# Altium PCB PCB1.PcbDoc
Units mm, origin at the board's own origin, x right, y up, seen from the top; angles counter-clockwise.
Board outline 50 x 70 mm, 2 copper layers (Top Layer, Bottom Layer); 36 components, 50 nets, 178 pads, 6 vias.
Unrouted connection lines stored in the file: 1.
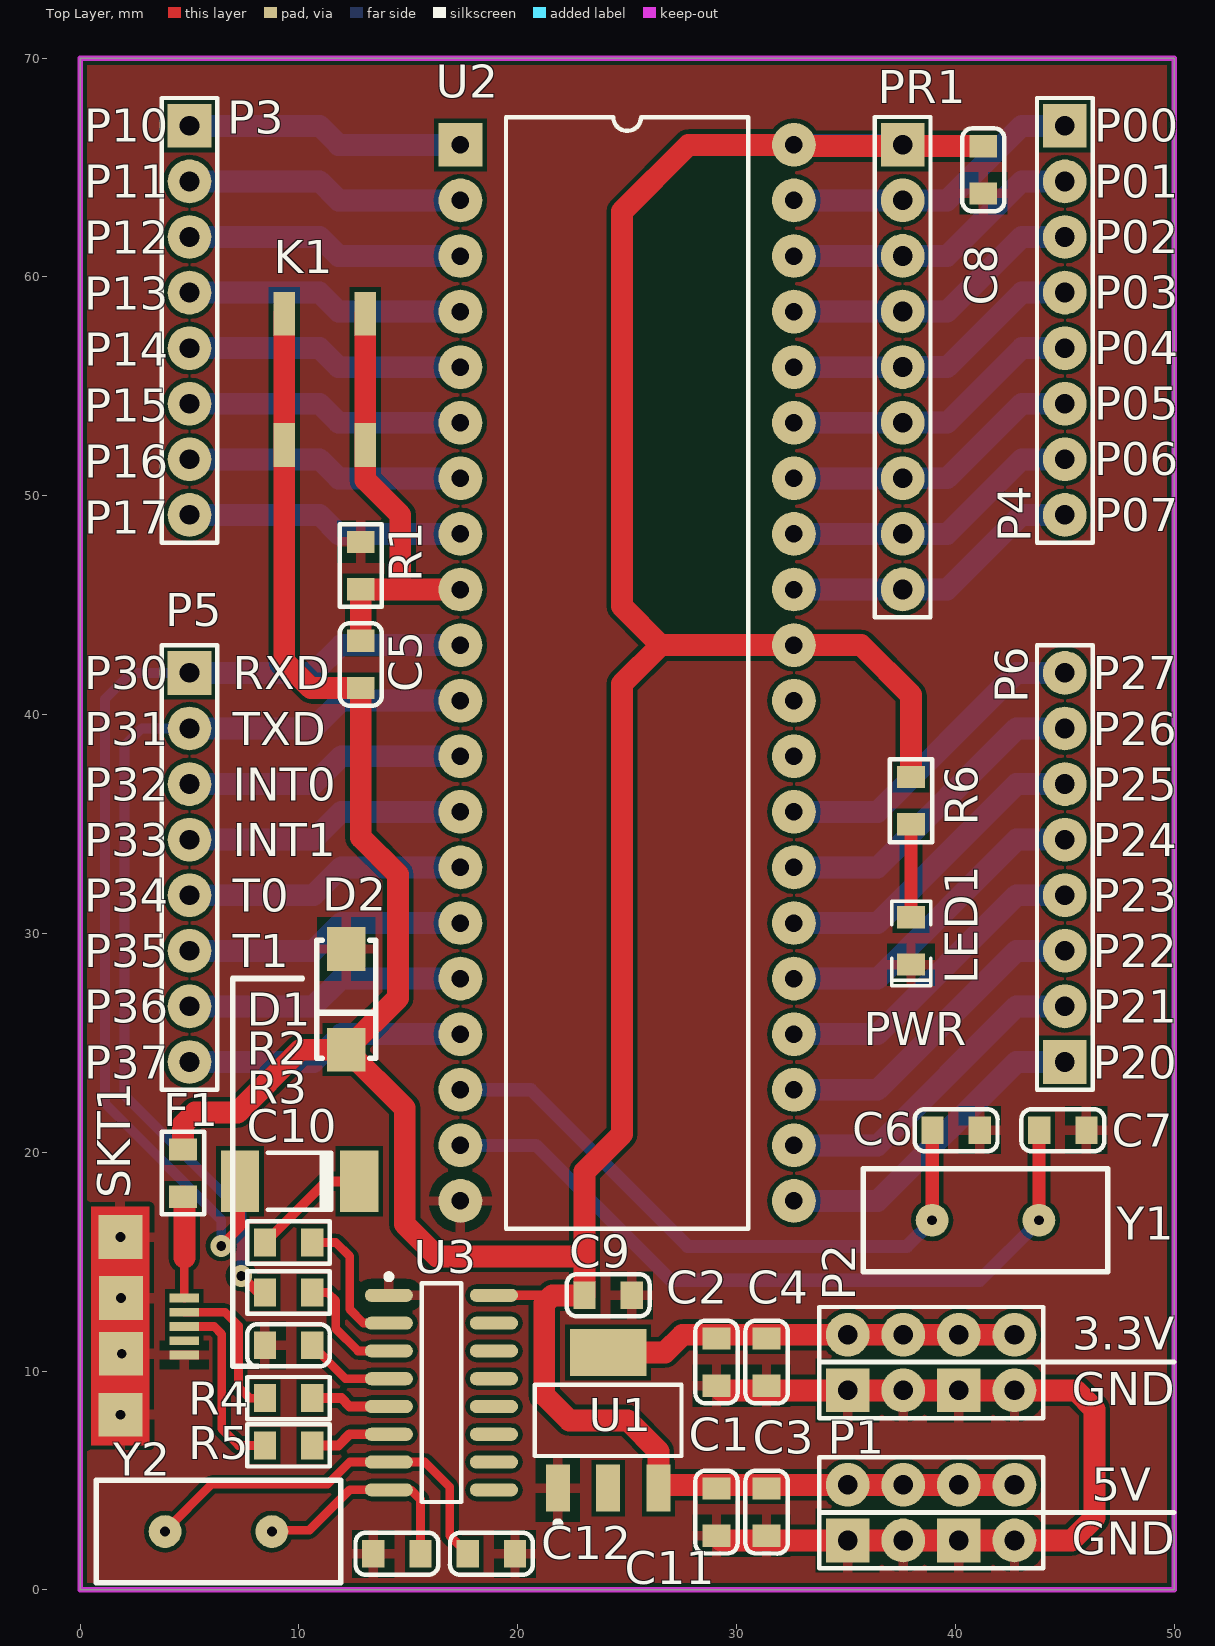
[diagram p0: Top Layer view]
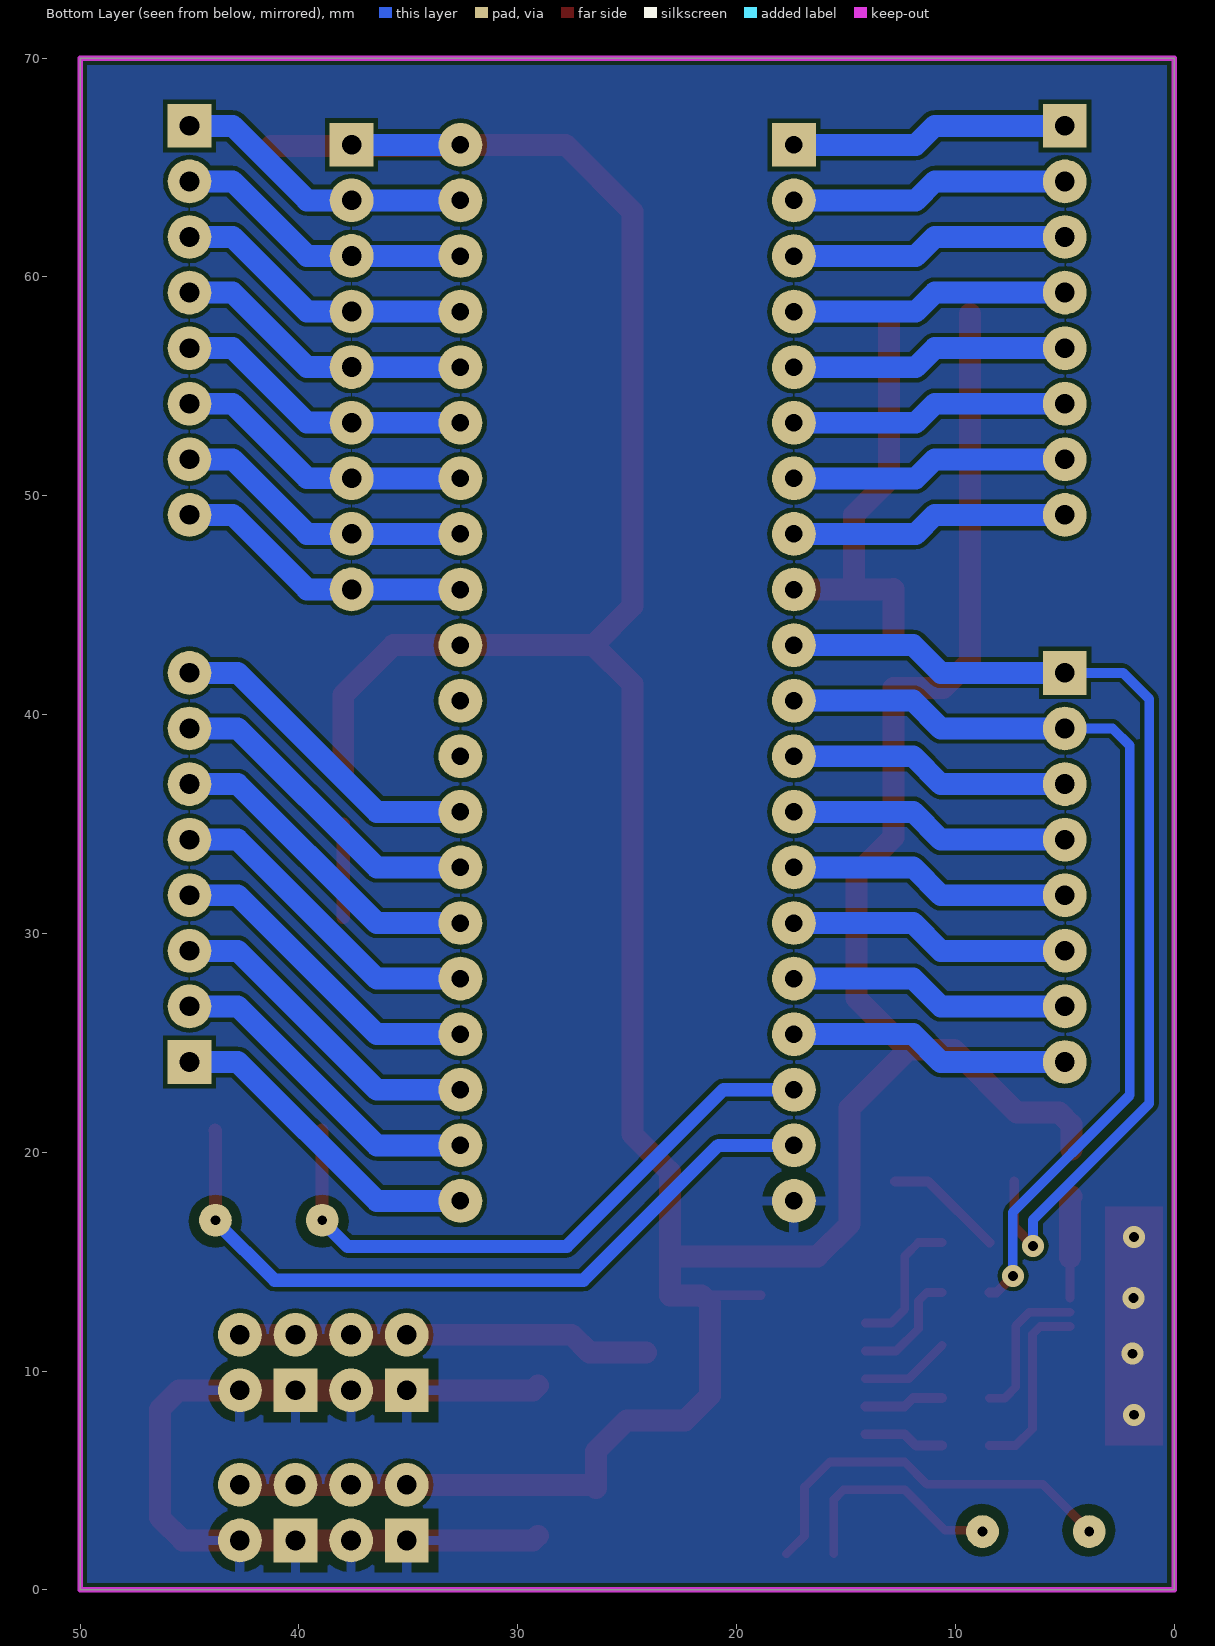
[diagram p1: Bottom Layer view, seen from below]

## Layer stack, top to bottom
Top Solder: solder mask 0.0102, Solder Resist, Dk 3.5
Top Layer: signal copper 0.0356
Dielectric 1: dielectric 0.32, FR-4, Dk 4.8
Bottom Layer: signal copper 0.0356
Bottom Solder: solder mask 0.0102, Solder Resist, Dk 3.5

## Board outline
0,0 50,0 50,70 0,70

## Design rules (kind name [scope] priority, off if disabled: settings)
Clearance [All] p1: gap=0.2
PlaneConnect [All] p1: planeconnectstyle=Relief reliefexpansion=0.508 reliefentries=4 reliefconductorwidth=0.45 reliefairgap=0.45
PolygonConnect [All] p1: connectstyle=Relief reliefconductorwidth=0.45 reliefentries=4 polygonreliefangle="90 Angle" airgapwidth=0.45
RoutingVias [All] p1: holewidth=0.711 width=1.27 viastyle="Through Hole" minholewidth=0.711 minwidth=1.27 maxholewidth=0.711 maxwidth=1.27
SolderMaskExpansion [All] p1: expansion=0.102
Width [All] p1: maxlimit=3 minlimit=0.254 preferedwidth=0.254
29 further rules are at their usual default settings.

## Components (designator, comment, footprint, x,y, rotation, side; value= is the part's Value field where it differs from the comment)
C1 "Cap Pol2" 0805C 29.083,3.556 r270 top
C2 "Cap Pol2" 0805C 29.083,10.414 r270 top
C3 "Cap" 0805C 31.369,3.556 r90 top
C4 "Cap" 0805C 31.369,10.414 r90 top
C5 "Cap Pol2" 0805C 12.827,42.291 r90 top
C6 "Cap" 0805C 40.03,21.006 r180 top
C7 "Cap" 0805C 44.907,21.006 r180 top
C8 "Cap" 0805C 41.275,64.897 r90 top
C9 "Cap" 0805C 24.13,13.462 r180 top
C10 "Cap" 0805C 9.525,11.176 r180 top
C11 "Cap" 0805C 18.796,1.651 r0 top
C12 "Cap" 0805C 14.478,1.651 r180 top
D1 "1N4148" 1206D 10.033,18.669 r0 top
D2 "D Zener" DO-214 12.167,29.286 r270 top
F1 "Res2" 0805R 4.699,19.05 r90 top
K1 "SW" IT-1187 13.03,58.318 r270 top
LED1 "LED3" LED0805G 37.973,30.734 r270 top
P1 "Header 4X2" "HDR 2X4" 37.617,2.261 r0 top
P2 "Header 4X2" "HDR 2X4" 37.617,9.119 r0 top
P3 "Header 8" "HDR 1X8" 5,66.905 r270 top
P4 "Header 8" "HDR 1X8" 45,66.905 r270 top
P5 "Header 8" "HDR 1X8" 5,41.905 r270 top
P6 "Header 8" "HDR 1X8" 45,24.125 r90 top
PR1 "10K" HDR1X9 37.592,66.04 r270 top
R1 "Res1" 0805R 12.827,46.812 r270 top
R2 "Res1" 0805R 9.525,15.875 r0 top
R3 "Res1" 0805R 9.525,13.589 r0 top
R4 "Res1" 0805R 9.525,8.763 r0 top
R5 "Res1" 0805R 9.525,6.604 r0 top
R6 "Res1" 0805R 37.973,36.068 r90 top
SKT1 "USB" MicroUSB 3.302,12.065 r180 top
U1 "LM1117" SOT_223 24.13,7.747 r0 top
U2 "89C52" DIP403D 25,41.905 r0 top
U3 "CH340" SOIC-16 16.51,9.017 r0 top
Y1 "12MHz" HC49 41.375,16.891 r0 top
Y2 "12MHz" HC49 6.323,2.667 r0 top

## Footprints (in the part's own frame and the unit in brackets; to place one, negate y for a bottom-side part, rotate by r counter-clockwise, add the part's x,y. Pads: shape width x height; smd on the part's side, far side on the other; paste and mask are expansions set on the pad)
0805C [mil]
  rect 40x50 smd: 1(-42.5,0) 2(42.5,0)
  silkscreen extent -75,-38 75,38, body extent -39,-25 39,25, height 30
0805R [mil]
  rect 40x50 smd: 1(-42.5,0) 2(42.5,0)
  silkscreen extent -74,-38 74,38, body extent -39,-25 40,25, height 30
1206D [mm]
  rect 1.75x2.8 smd: 1(-2.725,0) 2(2.725,0)
  silkscreen extent -1.45,-1.3 1.45,1.3, body extent -2.6,-1.23 2.6,1.23, height 2.46
DIP403D [mm]
  rect 2x2 hole 0.8: 1(-7.62,24.13)
  round 2 hole 0.8: 2(-7.62,21.59) 3(-7.62,19.05) 4(-7.62,16.51) 5(-7.62,13.97) 6(-7.62,11.43) 7(-7.62,8.89) 8(-7.62,6.35) 9(-7.62,3.81) 10(-7.62,1.27) 11(-7.62,-1.27) 12(-7.62,-3.81) 13(-7.62,-6.35) 14(-7.62,-8.89) 15(-7.62,-11.43) 16(-7.62,-13.97) 17(-7.62,-16.51) 18(-7.62,-19.05) 19(-7.62,-21.59) 20(-7.62,-24.13) 21(7.62,-24.13) 22(7.62,-21.59) 23(7.62,-19.05) 24(7.62,-16.51) 25(7.62,-13.97) 26(7.62,-11.43) 27(7.62,-8.89) 28(7.62,-6.35) 29(7.62,-3.81) 30(7.62,-1.27) 31(7.62,1.27) 32(7.62,3.81) 33(7.62,6.35) 34(7.62,8.89) 35(7.62,11.43) 36(7.62,13.97) 37(7.62,16.51) 38(7.62,19.05) 39(7.62,21.59) 40(7.62,24.13)
  silkscreen extent -5.54,-25.4 5.54,25.4, body extent -7.65,-25.02 7.65,25.78, height 5.55
DO-214 [mm]
  rect 2x1.75 smd: 1(0,0) 2(4.6,0)
  silkscreen extent -0.4,-1.35 5,1.35, body extent -0.2,-1.34 4.91,1.33, height 2.12
HC49 [mm]
  round 1.5 hole 0.45: 1(-2.44,0) 2(2.44,0)
  silkscreen extent -5.59,-2.35 5.59,2.35, body extent -5.68,-2.34 5.67,2.31, height 3.7
HDR1X9 [mm] "Connector; Header; 9 Position"
  rect 2x2 hole 0.9: 1(0,0)
  round 2 hole 0.9: 2(2.54,0) 3(5.08,0) 4(7.62,0) 5(10.16,0) 6(12.7,0) 7(15.24,0) 8(17.78,0) 9(20.32,0)
  silkscreen extent -1.27,-1.27 21.59,1.27
"HDR 1X8" [mm] "Connector; Header; 8 Position"
  rect 2x2 hole 0.9: 1(0,0)
  round 2 hole 0.9: 2(2.54,0) 3(5.08,0) 4(7.62,0) 5(10.16,0) 6(12.7,0) 7(15.24,0) 8(17.78,0)
  silkscreen extent -1.27,-1.27 19.05,1.27, body extent -1.27,-1.27 19.05,1.27, height 0.7
"HDR 2X4" [mm]
  rect 2x2 hole 0.9: 1(-2.54,0) 5(2.54,0)
  round 2 hole 0.9: 2(-2.54,2.54) 3(0,0) 4(0,2.54) 6(2.54,2.54) 7(5.08,0) 8(5.08,2.54)
  silkscreen extent -3.84,-1.27 6.4,3.81, body extent -3.81,-1.3 6.35,3.81, height 8.38
IT-1187 [mm]
  rect 2x1 smd: 1(0,0) 1(6,0) 2(0,-3.7) 2(6,-3.7)
  body extent -0.25,-4.45 6.15,0.75, height 1.5
LED0805G [mil]
  rect 40x50 smd: 1(0,0) 2(85,0)
  silkscreen extent -29,-35 123,35, body extent 3,-24 83,25, height 43
MicroUSB [mm]
  rect 1.35x0.4 smd: 1(-1.46,-1.27) 2(-1.46,-0.62) 3(-1.46,0.03) 4(-1.46,0.68) 5(-1.461,1.33)
  rect 2x2 smd: 6(1.461,-4.064) 7(1.46,4.064) 8(1.435,-1.27) 9(1.435,1.27)
  body extent -1.71,-4.4 3.89,4.4, height 2.74
SOIC-16 [mm] "SOIC, 16-Leads, Body 9.90x3.90mm, Pitch 1.27mm, IPC Medium Density"
  oval 2.2x0.6 smd: 1(-2.4,4.445) 2(-2.4,3.175) 3(-2.4,1.905) 4(-2.4,0.635) 5(-2.4,-0.635) 6(-2.4,-1.905) 7(-2.4,-3.175) 8(-2.4,-4.445) 9(2.4,-4.445) 10(2.4,-3.175) 11(2.4,-1.905) 12(2.4,-0.635) 13(2.4,0.635) 14(2.4,1.905) 15(2.4,3.175) 16(2.4,4.445)
  silkscreen extent -2.52,-5 0.9,5.42, body extent -3,-4.95 3,4.95, height 1.4
SOT_223 [mm] "SOT-223/SC-73; 4 Leads; Body 6.7 x 7.3 mm, inc. leads (LxW max)"
  rect 1.1x2.15 smd: 1(2.3,-3.1) 2(-2.3,-3.1) 3(0,-3.1)
  rect 3.5x2.15 smd: 4(0,3.1)
  silkscreen extent -3.35,-4.85 3.35,1.63, body extent -3.25,-3.58 3.25,3.38, height 1.65

## Part data
C1 C2 C5: "Polarized Capacitor (Axial)"
C3 C4 C6 C7 C8 C9 C10 C11 C12: "Capacitor"
D1: library part "Diode 1N4148", "High Conductance Fast Diode"
D2: "Zener Diode"
F1 R1 R2 R3 R4 R5 R6: "Resistor"
LED1: "Typical BLUE SiC LED"
P1 P2: "Header, 4-Pin, Dual row"
P3 P4 P5 P6: "Header, 8-Pin"
PR1: library part "Header 9", "Header, 9-Pin"
SKT1: library part "Micro USB"
U1: library part 1117
Y1 Y2: library part XTAL, "Crystal Oscillator"

## Via types
v1: diameter 1, hole 0.45, Top Layer to Bottom Layer, 4 vias
v2: diameter 1, hole 0.45, Top Layer to Bottom Layer, tented both sides, 2 vias

## Nets (pads, with @x,y where several pads share a name; then routed paths per layer and width w, separated by ;. In a path a pad name is that pad's centre, name@x,y a point inside that pad or via, vN(x,y) a via of type N, cw(c..) or ccw(c..) an arc to the next point about the centre after c; other vN are vias at no path point)
3V3: C2.1 C4.2 P2.2 P2.4 P2.6 P2.8 U1.3 U1.4 | length 18.9
  Top Layer w1: U1.4 26.722,10.847 27.534,11.659 P2.2 P2.4 P2.6 P2.8
D+: R5.1 SKT1.3 | length 8.5
  Top Layer w0.4: SKT1.3 6.126,12.035 6.477,11.684 6.477,7.366 7.239,6.604 R5.1
D+_1: R5.2 U3.6 | length 3.7
  Top Layer w0.45: R5.2 11.811,6.604 12.319,7.112 U3.6
D-: R4.1 SKT1.2 | length 6.9
  Top Layer w0.4: SKT1.2 6.619,12.685 7.239,12.065 7.239,9.271 7.747,8.763 R4.1
D-_1: R4.2 U3.5 | length 3.7
  Top Layer w0.45: R4.2 11.938,8.763 12.319,8.382 U3.5
GND: C1.2 C2.2 C3.1 C4.1 C6.1 C7.1 C8.1 C9.1 C10.2 C11.2 C12.2 D2.1 LED1.2 P1.1 P1.3 P1.5 P1.7 P2.1 P2.3 P2.5 P2.7 R1.1 SKT1.5 SKT1.6 SKT1.7 SKT1.8 SKT1.9 U1.2 U2.20 U3.1 | length 40.5
  Top Layer w1: C1.2 29.299,2.261 P1.1 P1.3 P1.5 P1.7 45.314,2.261 46.355,3.302 46.355,8.255 45.491,9.119 P2.7 P2.5 P2.3 P2.1 29.299,9.119 C2.2
  other v1: 1.841,8.001 1.905,10.795 1.867,13.335 1.841,16.129
NetC10_1: C10.1 U3.4 | length 4.1
  Top Layer w0.4: C10.1 12.128,9.652 U3.4
NetC11_1: C11.1 U3.7 Y2.1 | length 18.1
  Top Layer w0.4: Y2.1@3.912,2.731 6.007,4.826 11.303,4.826 12.319,5.842 U3.7 15.748,5.842 16.891,4.699 16.891,2.476 C11.1
NetC12_1: C12.1 U3.8 Y2.2 | length 10.2
  Top Layer w0.4: Y2.2@8.792,2.731 10.478,2.731 12.319,4.572 U3.8 15.113,4.572 15.557,4.127 C12.1
NetD1_2: D1.2 R2.1 | length 5.5
  Top Layer w0.45: R2.1 11.239,18.669 D1.2
NetF1_1: F1.1 SKT1.1 | length 4.7
  Top Layer w0.4: SKT1.1 4.763,15.176
  Top Layer w1: F1.1 4.763,17.907 4.763,15.176
NetLED1_1: LED1.1 R6.1 | length 4.3
  Top Layer w0.6: LED1.1 R6.1
NetR2_2: R2.2 U3.2 | length 6.4
  Top Layer w0.4: R2.2 11.684,15.875 12.319,15.24 12.319,12.827 12.954,12.192 U3.2
NetR3_2: R3.2 U3.3 | length 5.4
  Top Layer w0.4: R3.2 11.303,13.589 11.684,13.208 11.684,11.938 12.7,10.922 U3.3
P00: P4.1 PR1.2 U2.39 | length 13.8
  Bottom Layer w1: U2.39 37.587,63.495 PR1.2 39.624,63.5 43.029,66.905 P4.1
P01: P4.2 PR1.3 U2.38 | length 13.8
  Bottom Layer w1: U2.38 37.587,60.955 PR1.3 39.624,60.96 43.029,64.365 P4.2
P02: P4.3 PR1.4 U2.37 | length 13.8
  Bottom Layer w1: U2.37 37.587,58.415 PR1.4 39.624,58.42 43.029,61.825 P4.3
P03: P4.4 PR1.5 U2.36 | length 13.8
  Bottom Layer w1: U2.36 37.587,55.875 PR1.5 39.624,55.88 43.029,59.285 P4.4
P04: P4.5 PR1.6 U2.35 | length 13.8
  Bottom Layer w1: U2.35 37.587,53.335 PR1.6 39.624,53.34 43.029,56.745 P4.5
P05: P4.6 PR1.7 U2.34 | length 13.8
  Bottom Layer w1: U2.34 37.587,50.795 PR1.7 39.624,50.8 43.029,54.205 P4.6
P06: P4.7 PR1.8 U2.33 | length 13.8
  Bottom Layer w1: U2.33 37.587,48.255 PR1.8 39.624,48.26 43.029,51.665 P4.7
P07: P4.8 PR1.9 U2.32 | length 13.8
  Bottom Layer w1: U2.32 37.587,45.715 PR1.9 39.624,45.72 43.029,49.125 P4.8
P10: P3.1 U2.1 | length 12.7
  Bottom Layer w1: P3.1@5,66.905 10.946,66.905 11.816,66.035 U2.1
P11: P3.2 U2.2 | length 12.7
  Bottom Layer w1: P3.2@5,64.365 10.946,64.365 11.816,63.495 U2.2
P12: P3.3 U2.3 | length 12.7
  Bottom Layer w1: P3.3@5,61.825 10.946,61.825 11.816,60.955 U2.3
P13: P3.4 U2.4 | length 12.7
  Bottom Layer w1: P3.4@5,59.285 10.946,59.285 11.816,58.415 U2.4
P14: P3.5 U2.5 | length 12.7
  Bottom Layer w1: P3.5@5,56.745 10.946,56.745 11.816,55.875 U2.5
P15: P3.6 U2.6 | length 12.7
  Bottom Layer w1: P3.6@5,54.205 10.946,54.205 11.816,53.335 U2.6
P16: P3.7 U2.7 | length 12.7
  Bottom Layer w1: P3.7@5,51.665 10.946,51.665 11.816,50.795 U2.7
P17: P3.8 U2.8 | length 12.7
  Bottom Layer w1: P3.8@5,49.125 10.946,49.125 11.816,48.255 U2.8
P20: P6.1 U2.21 | length 15
  Bottom Layer w1: U2.21 36.444,17.775 42.794,24.125 P6.1
P21: P6.2 U2.22 | length 15
  Bottom Layer w1: U2.22 36.444,20.315 42.794,26.665 P6.2
P22: P6.3 U2.23 | length 15
  Bottom Layer w1: U2.23 36.444,22.855 42.794,29.205 P6.3
P23: P6.4 U2.24 | length 15
  Bottom Layer w1: U2.24 36.444,25.395 42.794,31.745 P6.4
P24: P6.5 U2.25 | length 15
  Bottom Layer w1: U2.25 36.444,27.935 42.794,34.285 P6.5
P25: P6.6 U2.26 | length 15
  Bottom Layer w1: U2.26 36.444,30.475 42.794,36.825 P6.6
P26: P6.7 U2.27 | length 15
  Bottom Layer w1: U2.27 36.444,33.015 42.794,39.365 P6.7
P27: P6.8 U2.28 | length 15
  Bottom Layer w1: U2.28 36.444,35.555 42.794,41.905 P6.8
P30: D1.1 P5.1 U2.10 | length 47.7
  Top Layer w0.45: v2(6.452,15.723) 7.308,16.579 D1.1
  Bottom Layer w0.45: P5.1@5,41.905 2.332,41.905 1.143,40.716 1.143,22.225 6.452,16.916 v2(6.452,15.723)
  Bottom Layer w1: P5.1@5,41.905 10.663,41.905 11.933,43.175 U2.10
P31: P5.2 R3.1 U2.11 | length 44
  Top Layer w0.45: v2(7.366,14.351) 8.128,13.589 R3.1
  Bottom Layer w0.45: P5.2@5,39.365 2.814,39.365 2.032,38.583 2.032,22.606 7.377,17.261 7.377,14.362 v2(7.366,14.351)
  Bottom Layer w1: P5.2@5,39.365 10.663,39.365 11.933,40.635 U2.11
P32: P5.3 U2.12 | length 12.9
  Bottom Layer w1: P5.3@5,36.825 10.663,36.825 11.933,38.095 U2.12
P33: P5.4 U2.13 | length 12.9
  Bottom Layer w1: P5.4@5,34.285 10.663,34.285 11.933,35.555 U2.13
P34: P5.5 U2.14 | length 12.9
  Bottom Layer w1: P5.5@5,31.745 10.663,31.745 11.933,33.015 U2.14
P35: P5.6 U2.15 | length 12.9
  Bottom Layer w1: P5.6@5,29.205 10.663,29.205 11.933,30.475 U2.15
P36: P5.7 U2.16 | length 12.9
  Bottom Layer w1: P5.7@5,26.665 10.663,26.665 11.933,27.935 U2.16
P37: P5.8 U2.17 | length 12.9
  Bottom Layer w1: P5.8@5,24.125 10.663,24.125 11.933,25.395 U2.17
RST: C5.2 K1.1 R1.2 U2.9 | length 20.1
  Top Layer w1: C5.2 R1.2 ; R1.2@12.885,45.715 14.63,45.715 ; K1.1@13.03,58.318 13.03,52.318 13.03,50.724 14.63,49.124 14.63,45.715 ; U2.9 14.63,45.715
VCC: C1.1 C3.2 C5.1 C8.2 C9.2 D2.2 F1.2 K1.2 P1.2 P1.4 P1.6 P1.8 PR1.1 R6.2 U1.1 U2.31 U2.40 U3.16 | length 189.8
  Top Layer w0.45: U3.16 21.59,13.462
  Top Layer w1: F1.2 4.699,21.26 5.256,21.816 7.19,21.816 10.06,24.686 D2.2 ; K1.2@9.33,58.318 9.33,52.318 9.33,42.435 10.554,41.212 C5.1 12.827,34.392 14.529,32.69 14.529,27.048 D2.2 ; R6.2 37.973,40.894 35.692,43.175 U2.31 26.538,43.175 ; C8.2 32.678,65.977 U2.40 27.808,66.035 24.765,62.992 24.765,44.948 26.538,43.175 ; P1.8 P1.6 P1.4 P1.2 26.584,4.801 U1.1 26.43,6.336 25.019,7.747 22.352,7.747 21.209,8.89 21.209,13.081 21.59,13.462 C9.2 23.05,15.24 ; D2.2 14.834,22.019 14.834,16.713 16.307,15.24 23.05,15.24 ; 23.05,15.24 23.05,19.113 24.765,20.828 24.765,41.402 26.538,43.175
  Bottom Layer w1: U2.40 PR1.1@37.587,66.035
X1: C7.2 U2.19 Y1.2 | length 34.3
  Top Layer w0.6: Y1.2@43.819,16.853 43.819,20.997 C7.2
  Bottom Layer w0.6: U2.19 20.833,20.315 27,14.148 41.113,14.148 Y1.2@43.819,16.853
X2: C6.2 U2.18 Y1.1 | length 29.2
  Top Layer w0.6: Y1.1@38.939,16.853 38.939,20.993 C6.2
  Bottom Layer w0.6: U2.18 20.604,22.855 27.762,15.697 37.782,15.697 Y1.1@38.939,16.853
pads on no net: SKT1.4 U2.29 U2.30 U3.9 U3.10 U3.11 U3.12 U3.13 U3.14 U3.15

## Polygon pours and split planes (outlines as drawn)
GND on Top Layer "Top Layer-No Net" (solid, remove dead copper, pour order 2): 0,70 50,70 50,0 0,0
GND on Bottom Layer "Top Layer-No Net" (solid, pour order 4): 0,0 50,0 50,70 0,70

## Keep-outs
Keep-Out Layer:
  the board outline again, w0.254

## Other copper
Top Layer:
  rectangle net GND: 0.508,6.604 3.175,17.526

## Silkscreen, mask and mechanical layers (free items; w line width, h text height)
Top Overlay:
  lines w0.22: 33.782,3.531 50,3.531 ; 33.782,10.414 50,10.414
  lines w0.254: 8.113,10.211 6.985,10.211 6.985,27.94 10.16,27.94
  text "P10" at 0.183,66.167 h1.5
  text "P00" at 46.355,66.167 h1.5
  text "P01" at 46.355,63.627 h1.5
  text "P11" at 0.183,63.609 h1.5
  text "P02" at 46.355,61.087 h1.5
  text "P12" at 0.183,61.051 h1.5
  text "P03" at 46.355,58.547 h1.5
  text "P13" at 0.183,58.493 h1.5
  text "P04" at 46.355,56.007 h1.5
  text "P14" at 0.183,55.934 h1.5
  text "P05" at 46.355,53.467 h1.5
  text "P15" at 0.183,53.376 h1.5
  text "P06" at 46.355,50.927 h1.5
  text "P16" at 0.183,50.818 h1.5
  text "P07" at 46.355,48.387 h1.5
  text "P17" at 0.183,48.26 h1.5
  text "P30" at 0.183,41.148 h1.5
  text "RXD" at 6.985,41.148 h1.5
  text "P27" at 46.284,41.148 h1.5
  text "P31" at 0.183,38.608 h1.5
  text "TXD" at 6.985,38.608 h1.5
  text "P26" at 46.284,38.608 h1.5
  text "P32" at 0.183,36.068 h1.5
  text "INT0" at 6.985,36.068 h1.5
  text "P25" at 46.284,36.068 h1.5
  text "P33" at 0.183,33.528 h1.5
  text "INT1" at 6.985,33.528 h1.5
  text "P24" at 46.284,33.528 h1.5
  text "P34" at 0.183,30.988 h1.5
  text "T0" at 6.985,30.988 h1.5
  text "P23" at 46.284,30.988 h1.5
  text "P35" at 0.183,28.448 h1.5
  text "T1" at 6.985,28.448 h1.5
  text "P22" at 46.284,28.448 h1.5
  text "P36" at 0.183,25.908 h1.5
  text "P21" at 46.284,25.908 h1.5
  text "PWR" at 35.814,24.892 h1.5
  text "P37" at 0.183,23.368 h1.5
  text "P20" at 46.284,23.368 h1.5
  text "3.3V" at 45.339,10.973 h1.5
  text "GND" at 45.31,8.433 h1.5
  text "5V" at 46.228,4.064 h1.5
  text "GND" at 45.31,1.6 h1.5